# Altium PCB PCB1_wo_gnd_plane.PcbDoc (part 2 of 2)
Units mm, origin at the board's own origin, x right, y up, seen from the top; angles counter-clockwise.
Board outline 64 x 64 mm, 2 copper layers (Top Layer, Bottom Layer), stack 1.601 mm thick; 71 components, 44 nets, 225 pads, 58 vias.
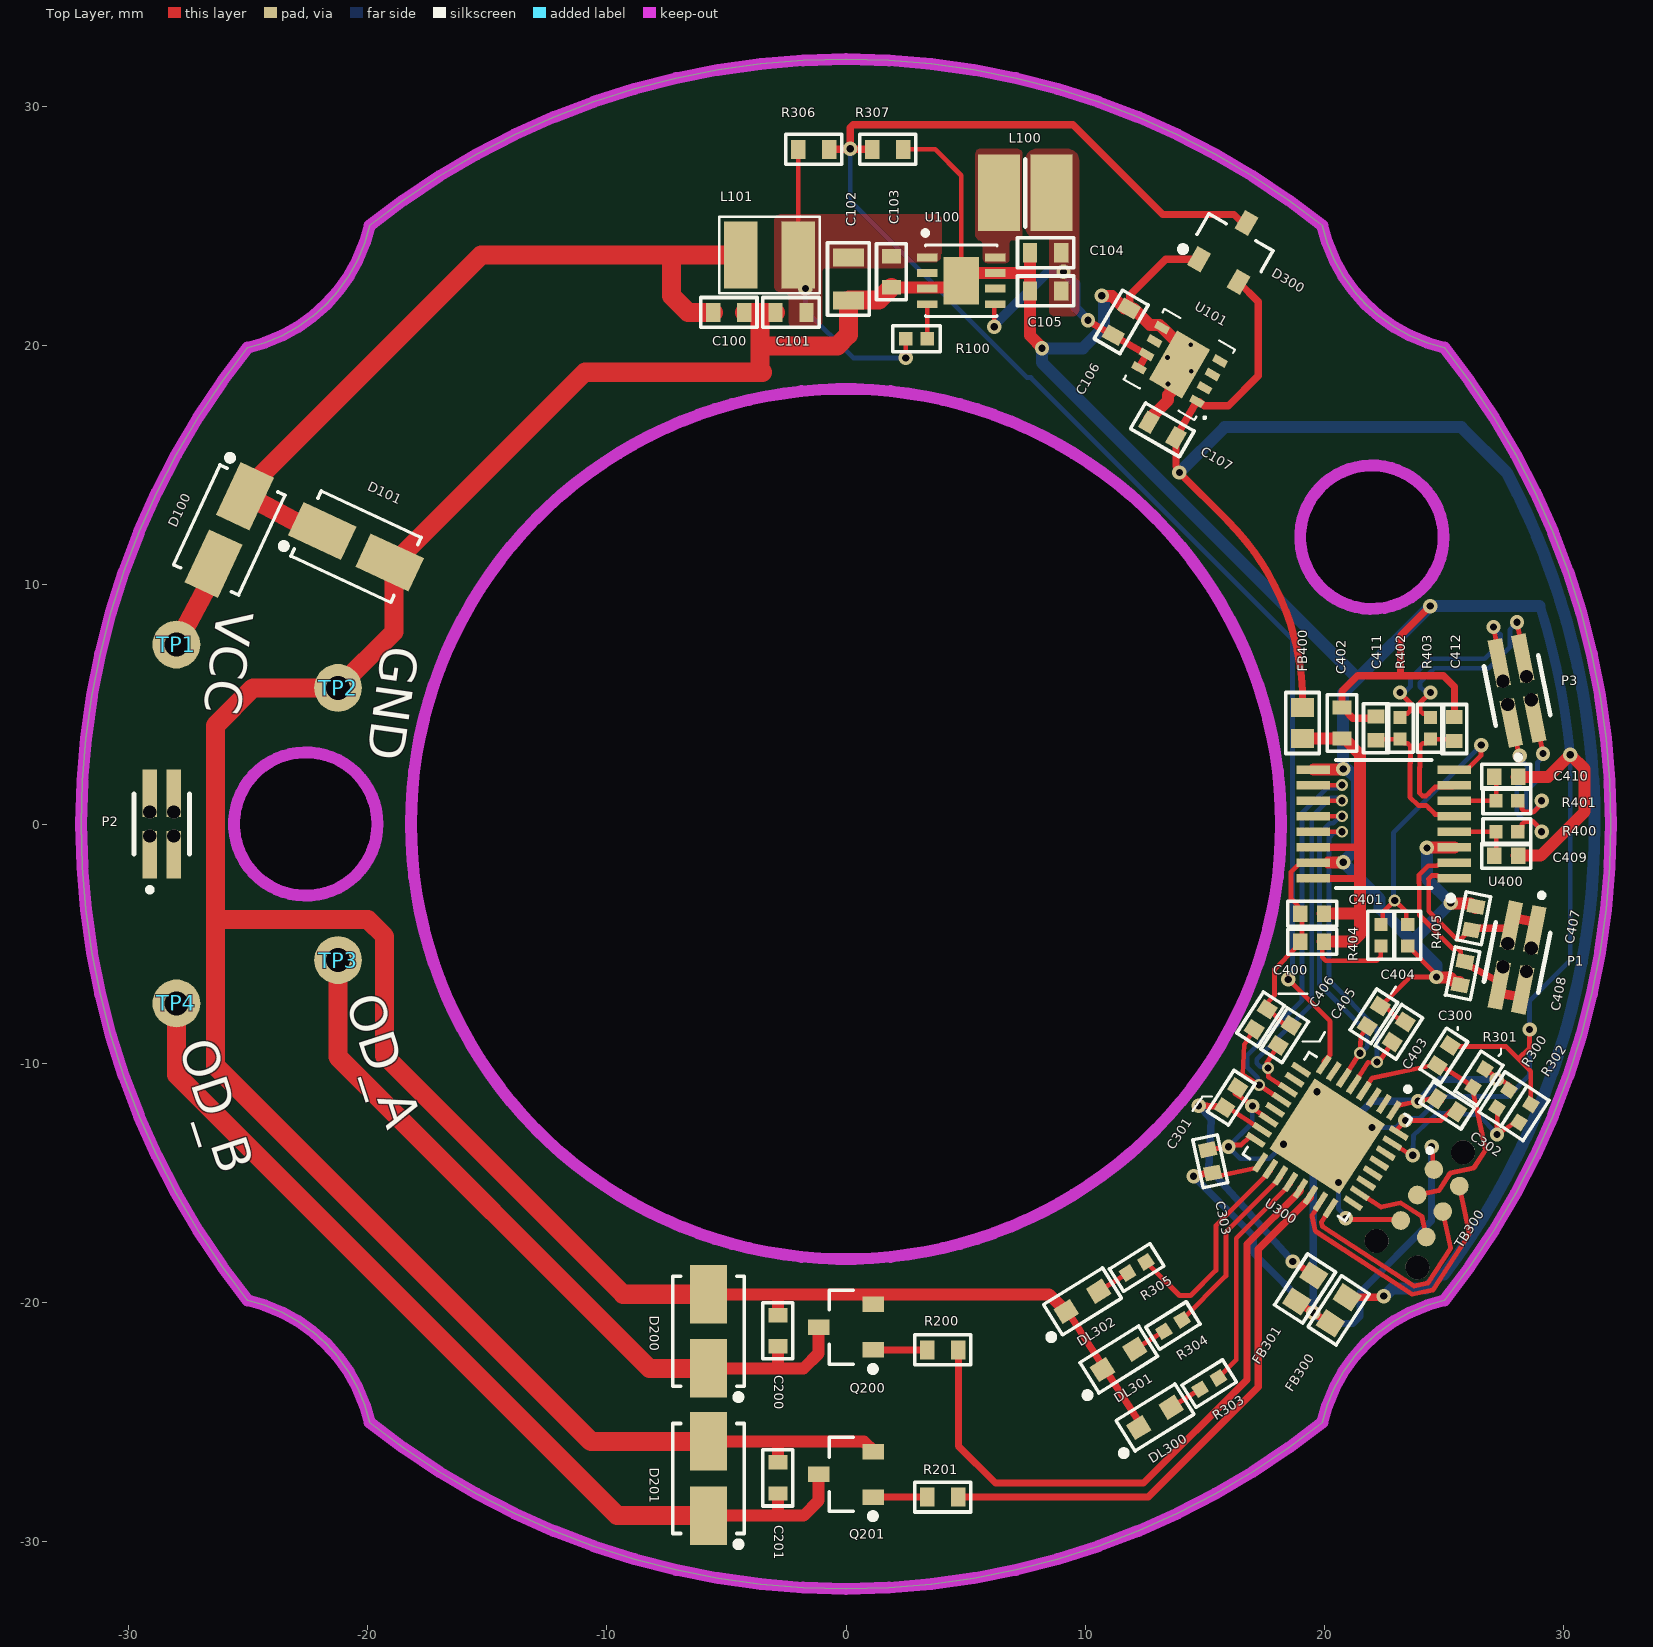
[diagram p0: Top Layer view]

## Keep-outs (continued)
Keep-Out Layer: (continued)
  lines w0.5: -32,0 -31.95,-1.792 -31.799,-3.579 -31.549,-5.354 -31.2,-7.112 -30.752,-8.848 -30.209,-10.557 -29.57,-12.232 -28.839,-13.868 -28.017,-15.462 -27.107,-17.006 -26.112,-18.498 -25.035,-19.931 -24.303,-20.14 -23.599,-20.429 -22.932,-20.797 -22.311,-21.237 -21.744,-21.744 -21.237,-22.311 -20.797,-22.932 -20.43,-23.599 -20.14,-24.303 -19.931,-25.035 -18.498,-26.112 -17.006,-27.107 -15.462,-28.017 -13.868,-28.839 -12.232,-29.57 -10.557,-30.209 -8.848,-30.752 -7.112,-31.2 -5.354,-31.549 -3.579,-31.799 -1.792,-31.95 0,-32 1.792,-31.95 3.578,-31.799 5.354,-31.549 7.112,-31.2 8.848,-30.752 10.556,-30.209 12.232,-29.57 13.868,-28.839 15.462,-28.017 17.006,-27.107 18.498,-26.112 19.931,-25.035 20.14,-24.303 20.429,-23.599 20.797,-22.932 21.237,-22.311 21.744,-21.744 22.311,-21.237 22.932,-20.797 23.599,-20.429 24.303,-20.14 25.035,-19.931 26.112,-18.498 27.107,-17.006 28.017,-15.462 28.839,-13.868 29.57,-12.232 30.209,-10.557 30.752,-8.848 31.2,-7.112 31.549,-5.354 31.799,-3.579 31.95,-1.792 32,0 31.95,1.792 31.799,3.579 31.549,5.354 31.2,7.112 30.752,8.848 30.209,10.557 29.57,12.232 28.839,13.868 28.017,15.462 27.107,17.006 26.112,18.498 25.035,19.931 24.303,20.14 23.599,20.429 22.932,20.797 22.311,21.237 21.744,21.744 21.237,22.311 20.797,22.932 20.429,23.599 20.14,24.303 19.931,25.035 18.498,26.112 17.006,27.107 15.462,28.017 13.868,28.839 12.232,29.57 10.556,30.209 8.848,30.752 7.112,31.2 5.354,31.549 3.578,31.799 1.792,31.95 0,32 -1.792,31.95 -3.579,31.799 -5.354,31.549 -7.112,31.2 -8.848,30.752 -10.557,30.209 -12.232,29.57 -13.868,28.839 -15.462,28.017 -17.006,27.107 -18.498,26.112 -19.931,25.035 -20.14,24.303 -20.43,23.599 -20.797,22.932 -21.237,22.311 -21.744,21.744 -22.311,21.237 -22.932,20.797 -23.599,20.429 -24.303,20.14 -25.035,19.931 -26.112,18.498 -27.107,17.006 -28.017,15.462 -28.839,13.868 -29.57,12.232 -30.209,10.557 -30.752,8.848 -31.2,7.112 -31.549,5.354 -31.799,3.579 -31.95,1.792 -32,0

## Silkscreen, mask and mechanical layers (free items; w line width, h text height)
Top Overlay:
  lines w0.1: 14.5,-12 14.909,-11.405 15.3,-11.4 ; 18.1,-7.1 19.3,-7.1 ; 19.1,-9.1 19.8,-9.1 20.029,-8.718 ; 22.8,-7.1 23,-6.8 ; 25.6,-8.6 25.6,-8.5 ; 27.3,-9.7 27.4,-9.6 27.4,-9.4
  text "VCC" at -26.284,9.013 h1.52 r262
  text "GND" at -19.384,7.513 h1.52 r262
  text "OD_A" at -20.938,-7.385 h1.52 r288
  text "OD_B" at -27.938,-9.285 h1.52 r288
Board Shape (Mech10):
  circle w0.1: c0,0 r18.2
  circle w0.254: c22,12 r3
  circle w0.254: c-22.6,0 r3
  lines w0.5: -32,0 -31.95,1.792 -31.799,3.579 -31.549,5.354 -31.2,7.112 -30.752,8.848 -30.209,10.557 -29.57,12.232 -28.839,13.868 -28.017,15.462 -27.107,17.006 -26.112,18.498 -25.035,19.931 -24.303,20.14 -23.599,20.429 -22.932,20.797 -22.311,21.237 -21.744,21.744 -21.237,22.311 -20.797,22.932 -20.43,23.599 -20.14,24.303 -19.931,25.035 -18.498,26.112 -17.006,27.107 -15.462,28.017 -13.868,28.839 -12.232,29.57 -10.557,30.209 -8.848,30.752 -7.112,31.2 -5.354,31.549 -3.579,31.799 -1.792,31.95 0,32 1.792,31.95 3.578,31.799 5.354,31.549 7.112,31.2 8.848,30.752 10.556,30.209 12.232,29.57 13.868,28.839 15.462,28.017 17.006,27.107 18.498,26.112 19.931,25.035 20.14,24.303 20.429,23.599 20.797,22.932 21.237,22.311 21.744,21.744 22.311,21.237 22.932,20.797 23.599,20.429 24.303,20.14 25.035,19.931 26.112,18.498 27.107,17.006 28.017,15.462 28.839,13.868 29.57,12.232 30.209,10.557 30.752,8.848 31.2,7.112 31.549,5.354 31.799,3.579 31.95,1.792 32,0 31.95,-1.792 31.799,-3.579 31.549,-5.354 31.2,-7.112 30.752,-8.848 30.209,-10.557 29.57,-12.232 28.839,-13.868 28.017,-15.462 27.107,-17.006 26.112,-18.498 25.035,-19.931 24.303,-20.14 23.599,-20.429 22.932,-20.797 22.311,-21.237 21.744,-21.744 21.237,-22.311 20.797,-22.932 20.429,-23.599 20.14,-24.303 19.931,-25.035 18.498,-26.112 17.006,-27.107 15.462,-28.017 13.868,-28.839 12.232,-29.57 10.556,-30.209 8.848,-30.752 7.112,-31.2 5.354,-31.549 3.578,-31.799 1.792,-31.95 0,-32 -1.792,-31.95 -3.579,-31.799 -5.354,-31.549 -7.112,-31.2 -8.848,-30.752 -10.557,-30.209 -12.232,-29.57 -13.868,-28.839 -15.462,-28.017 -17.006,-27.107 -18.498,-26.112 -19.931,-25.035 -20.14,-24.303 -20.43,-23.599 -20.797,-22.932 -21.237,-22.311 -21.744,-21.744 -22.311,-21.237 -22.932,-20.797 -23.599,-20.429 -24.303,-20.14 -25.035,-19.931 -26.112,-18.498 -27.107,-17.006 -28.017,-15.462 -28.839,-13.868 -29.57,-12.232 -30.209,-10.557 -30.752,-8.848 -31.2,-7.112 -31.549,-5.354 -31.799,-3.579 -31.95,-1.792 -32,0

## Text inside footprints (layer, text, board x,y; h text height)
U400: Mechanical 17 "*" at 24.684,-1.206 h1.27 r180; Top Assembly "*" at 24.684,-1.206 h1.27 r180